# EAGLE board LeFish_Fuse_Panel (EAGLE 9.6.2)

Size 107.95 x 25.4 mm. Coordinates in mm from the lower left corner, seen from the top.
Outline: 0,24.13 0,1.27 arc90 1.27,0 106.68,0 arc90 107.95,1.27 107.95,24.13 arc90 106.68,25.4 1.27,25.4 arc90 0,24.13
Outline: 77.47,19.05 100.33,19.05 arc-90 101.6,17.78 101.6,7.62 arc-90 100.33,6.35 77.47,6.35 arc-90 76.2,7.62 76.2,17.78 arc-90 77.47,19.05
Copper layers (1*16): Top 0.035mm / dielectric 0.15mm / Bottom 0.035mm
Design rules "default": minimum track width 6mil, minimum drill 0.35mm, track to track 6mil, track to pad 6mil, pad to pad 6mil, via to via 6mil, smd to smd 6mil, copper to edge 40mil, drill to drill 6mil, minimum pad ring 10mil, minimum via ring 8mil, stop-mask expansion 4mil, vias tented up to drill 0mil, thermal gap 10mil

## Placement (x,y rotation side)
E$1  [MICRO_SERVO_ICETWS1514D]  19.05,9.53 0 top
E$2  [MICRO_SERVO_ICETWS1514D]  53.98,15.88 0 top

## Library data of the parts
E$1 E$2 = LeFish